# Altium PCB 点阵.PcbDoc
Units mil, origin at the board's own origin, x right, y up, seen from the top; angles counter-clockwise.
Board outline 6000 x 4000 mil, 2 copper layers (Top Layer, Bottom Layer); 4 components, 23 nets, 74 pads, 0 vias.
Unrouted connection lines stored in the file: 6.
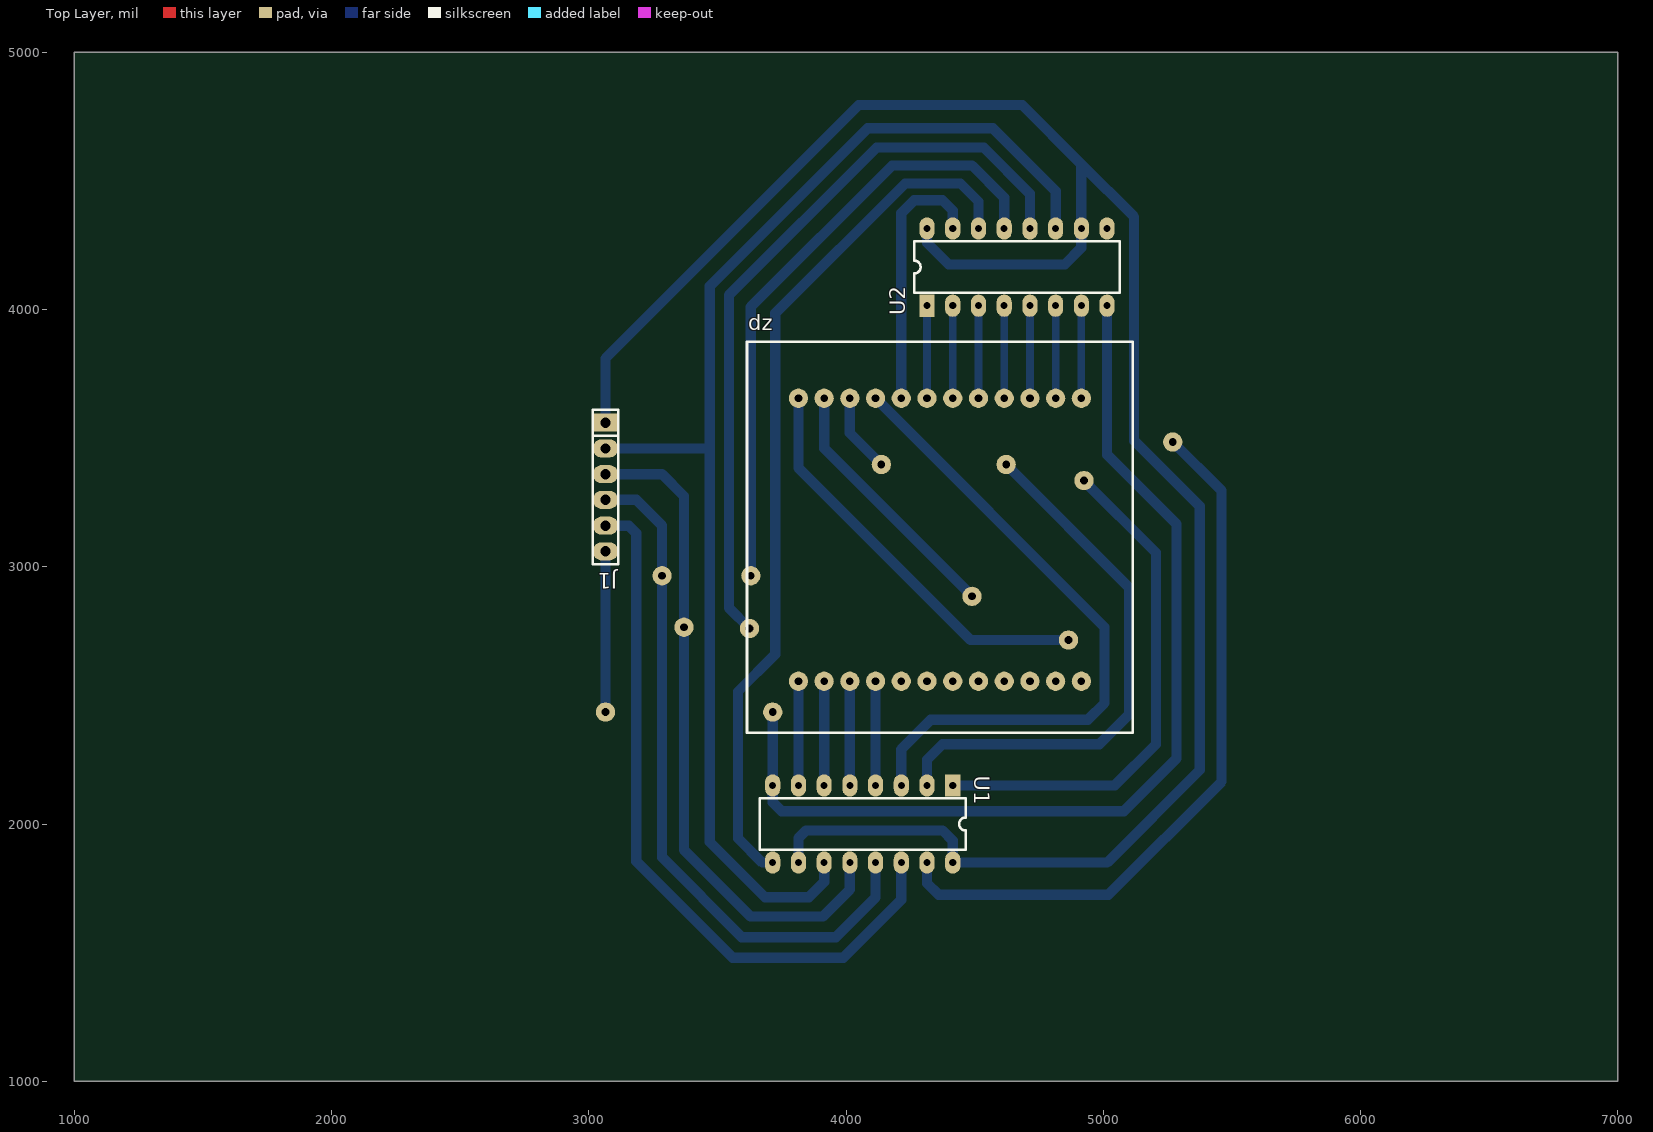
[diagram p0: Top Layer view]
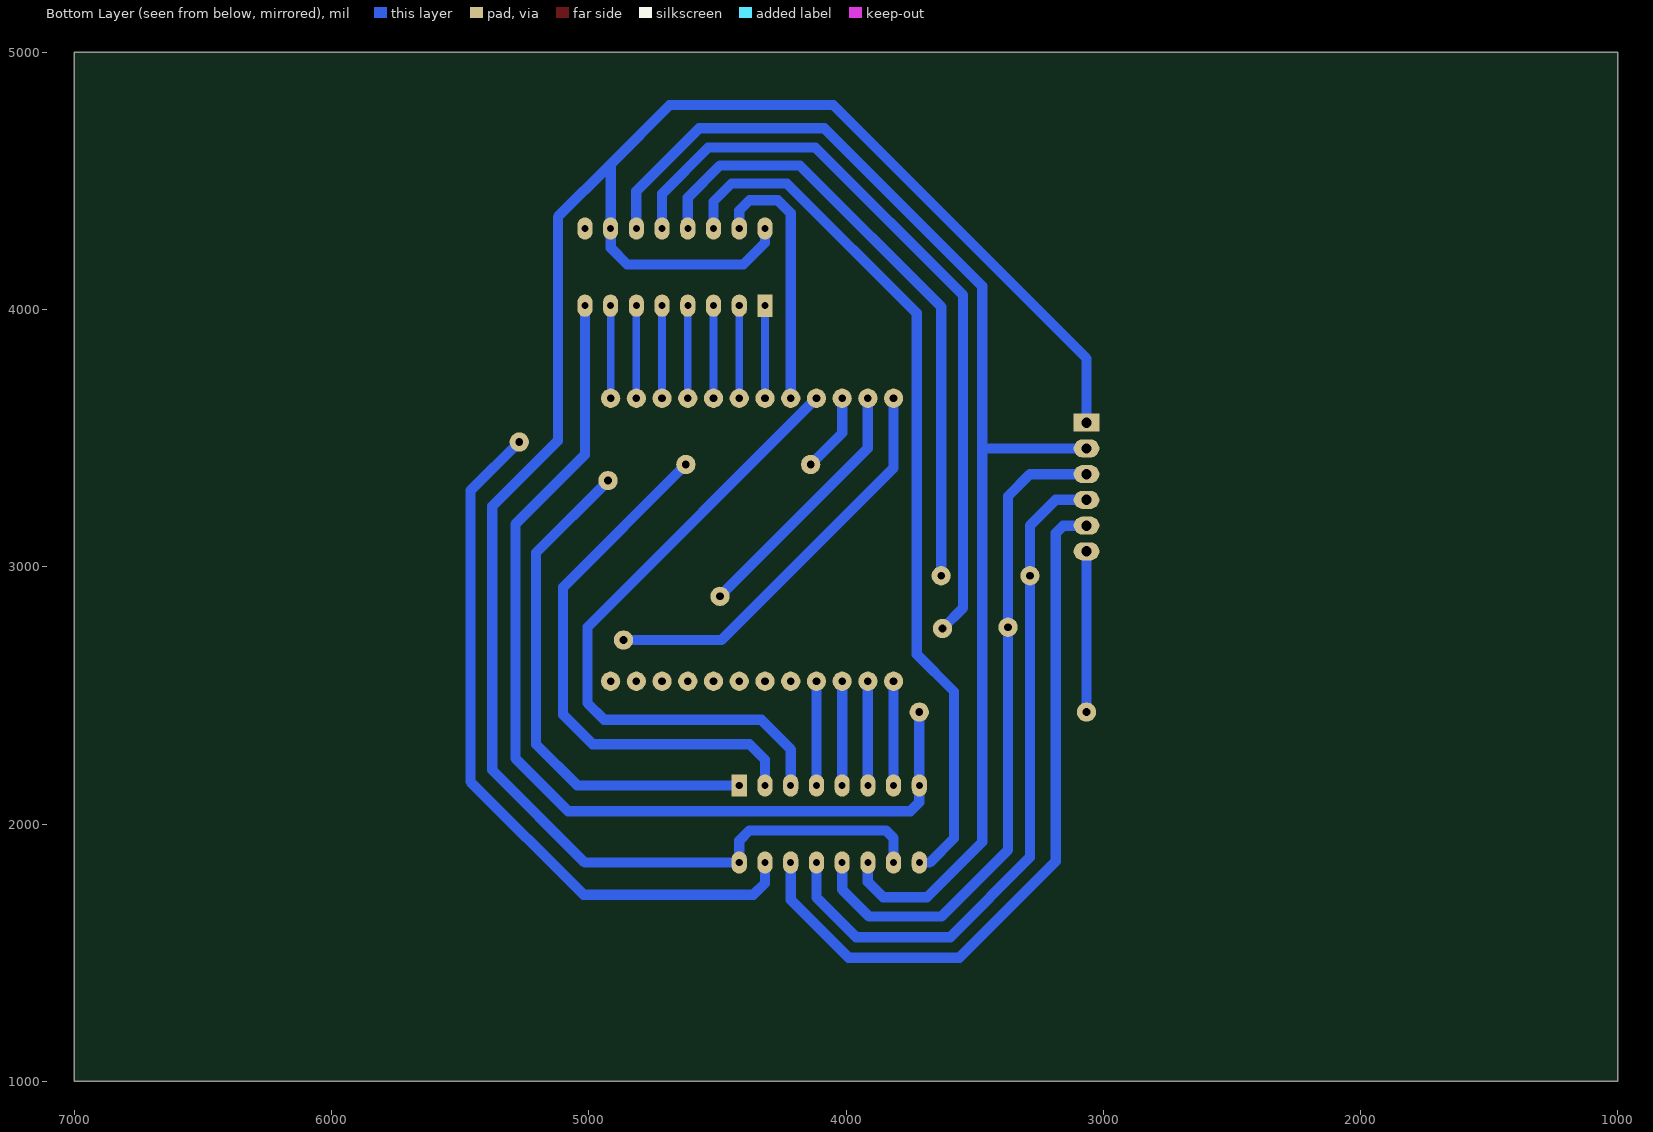
[diagram p1: Bottom Layer view, seen from below]

## Layer stack, top to bottom
Top Layer: signal copper 1.4
Dielectric: dielectric 12.6, FR-4, Dk 4.8
Bottom Layer: signal copper 1.4

## Board outline
1000,1000 7000,1000 7000,5000 1000,5000

## Design rules (kind name [scope] priority, off if disabled: settings)
Clearance [All] p1: gap=10
ComponentClearance [All] p1 off: gap=10 collisioncheckmode=3 verticalgap=10 showdistances=FALSE
PolygonConnect [All] p1: connectstyle=Relief reliefconductorwidth=10 reliefentries=4 polygonreliefangle="90 Angle" airgapwidth=10
RoutingVias [All] p1: holewidth=28 width=50 viastyle="Through Hole" minholewidth=28 minwidth=50 maxholewidth=28 maxwidth=50
SilkscreenOverComponentPads [All] p1: minsilkscreentomaskgap=10
SolderMaskExpansion [All] p1: expansion=4
Width [All] p1: maxlimit=100 minlimit=10 preferedwidth=10
26 further rules are at their usual default settings.

## Components (designator, comment, footprint, x,y, rotation, side; value= is the part's Value field where it differs from the comment)
dz "8*8LED_P24" 双色点阵 3815,2555 r0 top
J1 "CON6" sip-6 3065,3560 r270 top
U1 "74HC595" DIP-16 4415,2150 r270 top
U2 "74HC595" DIP-16 4315,4015 r90 top

## Footprints (in the part's own frame and the unit in brackets; to place one, negate y for a bottom-side part, rotate by r counter-clockwise, add the part's x,y. Pads: shape width x height; smd on the part's side, far side on the other; paste and mask are expansions set on the pad)
DIP-16 [mm]
  rect 2.2x1.5 hole 0.7: 1(0,0)
  oval 2.2x1.5 hole 0.7: 2(0,-2.54) 3(0,-5.08) 4(0,-7.62) 5(0,-10.16) 6(0,-12.7) 7(0,-15.24) 8(0,-17.78) 9(7.62,-17.78) 10(7.62,-15.24) 11(7.62,-12.7) 12(7.62,-10.16) 13(7.62,-7.62) 14(7.62,-5.08) 15(7.62,-2.54) 16(7.62,0)
  silkscreen extent 1.27,-19.05 6.35,1.27
sip-6 [mil]
  rect 70x100 hole 40: 1(0,0)
  oval 70x100 hole 40: 2(100,0) 3(200,0) 4(300,0) 5(400,0) 6(500,0)
  silkscreen extent -50,-50 550,50
双色点阵 [mil]
  round 75 hole 30: 1(0,0) 2(100,0) 3(200,0) 4(300,0) 5(400,0) 6(500,0) 7(600,0) 8(700,0) 9(800,0) 10(900,0) 11(1000,0) 12(1100,0) 13(1100,1100) 14(1000,1100) 15(900,1100) 16(800,1100) 17(700,1100) 18(600,1100) 19(500,1100) 20(400,1100) 21(300,1100) 22(200,1100) 23(100,1100) 24(0,1100)
  silkscreen extent -200,-200 1300,1320

## Part data
J1: "Conn"
U1 U2: library part 74H

## Free pads (board coordinates)
  round 75 hole 30: 25(3715,2435) 26(3065,2435) 27(5270,3485) 28(4865,2715) 29(4137.5,3397.5) 30(4490,2885) 31(4622.5,3397.5) 32(4925,3335) 33(3625,2760) 34(3630,2965) 35(3285,2965) 36(3370,2765)

## Nets (pads, with @x,y where several pads share a name; then routed paths per layer and width w, separated by ;. In a path a pad name is that pad's centre, name@x,y a point inside that pad or via, vN(x,y) a via of type N, cw(c..) or ccw(c..) an arc to the next point about the centre after c; other vN are vias at no path point)
"DATA IN": J1.5 U1.14 | length 2831
  Bottom Layer w40: J1.5 3155,3160 3185,3130 3185,1855 3560,1480 3990,1480 4215,1705 U1.14
GND: J1.6 pad.25 pad.26 U1.8 U2.8 | length 4521.2
  Bottom Layer w40: pad.26 J1.6 ; pad.25@3715,2440 U1.8 3715,2085 3750,2050 5080,2050 5285,2255 5285,3165 5015,3435 U2.8
Netdz_1: dz.1 U1.7 | length 405
  Bottom Layer w40: U1.7 dz.1
Netdz_2: dz.2 U1.6 | length 405
  Bottom Layer w40: U1.6 dz.2
Netdz_3: dz.3 U1.5 | length 405
  Bottom Layer w40: U1.5 dz.3
Netdz_4: dz.4 U1.4 | length 405
  Bottom Layer w40: U1.4 dz.4
Netdz_13: dz.13 U2.7 | length 360
  Bottom Layer w30: dz.13 U2.7
Netdz_14: dz.14 U2.6 | length 360
  Bottom Layer w30: dz.14 U2.6
Netdz_15: dz.15 U2.5 | length 360
  Bottom Layer w30: dz.15 U2.5
Netdz_16: dz.16 U2.4 | length 360
  Bottom Layer w30: dz.16 U2.4
Netdz_17: dz.17 U2.3 | length 360
  Bottom Layer w30: dz.17 U2.3
Netdz_18: dz.18 U2.2 | length 360
  Bottom Layer w30: dz.18 U2.2
Netdz_19: dz.19 U2.1 | length 360
  Bottom Layer w30: dz.19 U2.1
Netdz_20: dz.20 U2.15 | length 1027.3
  Bottom Layer w40: dz.20 4215,4375 4265,4425 4375,4425 4415,4385 U2.15
Netdz_21: dz.21 U1.3 | length 2558.2
  Bottom Layer w40: dz.21 5005,2765 5005,2470 4940,2405 4330,2405 4215,2290 U1.3
Netdz_22: dz.22 pad.29 pad.31 U1.2 | length 2436
  Bottom Layer w40: dz.22 4015,3520 pad.29 ; U1.2 4315,2250 4375,2310 4985,2310 5100,2425 5100,2920 pad.31
Netdz_23: dz.23 pad.30 pad.32 U1.1 | length 3005.4
  Bottom Layer w40: dz.23 3915,3460 pad.30 ; U1.1 5045,2150 5205,2310 5205,3055 pad.32
Netdz_24: dz.24 pad.27 pad.28 U1.15 | length 4422.1
  Bottom Layer w40: dz.24 3815,3385 4485,2715 pad.28 ; U1.15 4315,1770 4360,1725 5020,1725 5460,2165 5460,3295 pad.27
NetU1_9: U1.9 U2.14 | length 3407.6
  Bottom Layer w40: U1.9 3675,1850 3580,1945 3580,2515 3725,2660 3725,3985 4230,4490 4445,4490 4515,4420 U2.14
PWM: J1.4 pad.34 pad.35 U1.13 U2.13 | length 5138.6
  Bottom Layer w40: J1.4 3185,3260 3285,3160 3285,1870 3595,1560 3960,1560 4115,1715 U1.13 ; pad.34 3630,4010 4180,4560 4490,4560 4615,4435 U2.13
"R CLK": J1.3 pad.33 pad.36 U1.12 U2.12 | length 5562.3
  Bottom Layer w40: J1.3 3285,3360 3370,3275 3370,1900 3630,1640 3910,1640 4015,1745 U1.12 ; pad.33 3545,2840 3545,4055 4120,4630 4535,4630 4715,4450 U2.12
"S CLK": J1.2 U1.11 U2.11 | length 5025.1
  Bottom Layer w40: J1.2 3470,3460 ; U1.11 3915,1775 3855,1715 3685,1715 3470,1930 3470,3460 ; U2.11@4815,4335 4815,4460 4570,4705 4085,4705 3470,4090 3470,3460
VCC: J1.1 U1.10 U1.16 U2.10 U2.16 | length 8109.1
  Bottom Layer w40: J1.1 3065,3810 4050,4795 4685,4795 4915,4565 ; U1.10 3815,1945 3845,1975 4375,1975 4415,1935 U1.16 5015,1850 5375,2210 5375,3235 5120,3490 5120,4360 4915,4565 ; U2.16 4315,4260 4400,4175 4850,4175 4915,4240 U2.10 4915,4565
pads on no net: dz.5 dz.6 dz.7 dz.8 dz.9 dz.10 dz.11 dz.12 U2.9